# Altium PCB KHKT25_ver2.PcbDoc
Units mm, origin at the board's own origin, x right, y up, seen from the top; angles counter-clockwise.
Board outline 49.89 x 30.03 mm, 2 copper layers (Top Layer, Bottom Layer); 53 components, 27 nets, 171 pads, 26 vias.
Unrouted connection lines stored in the file: 4.
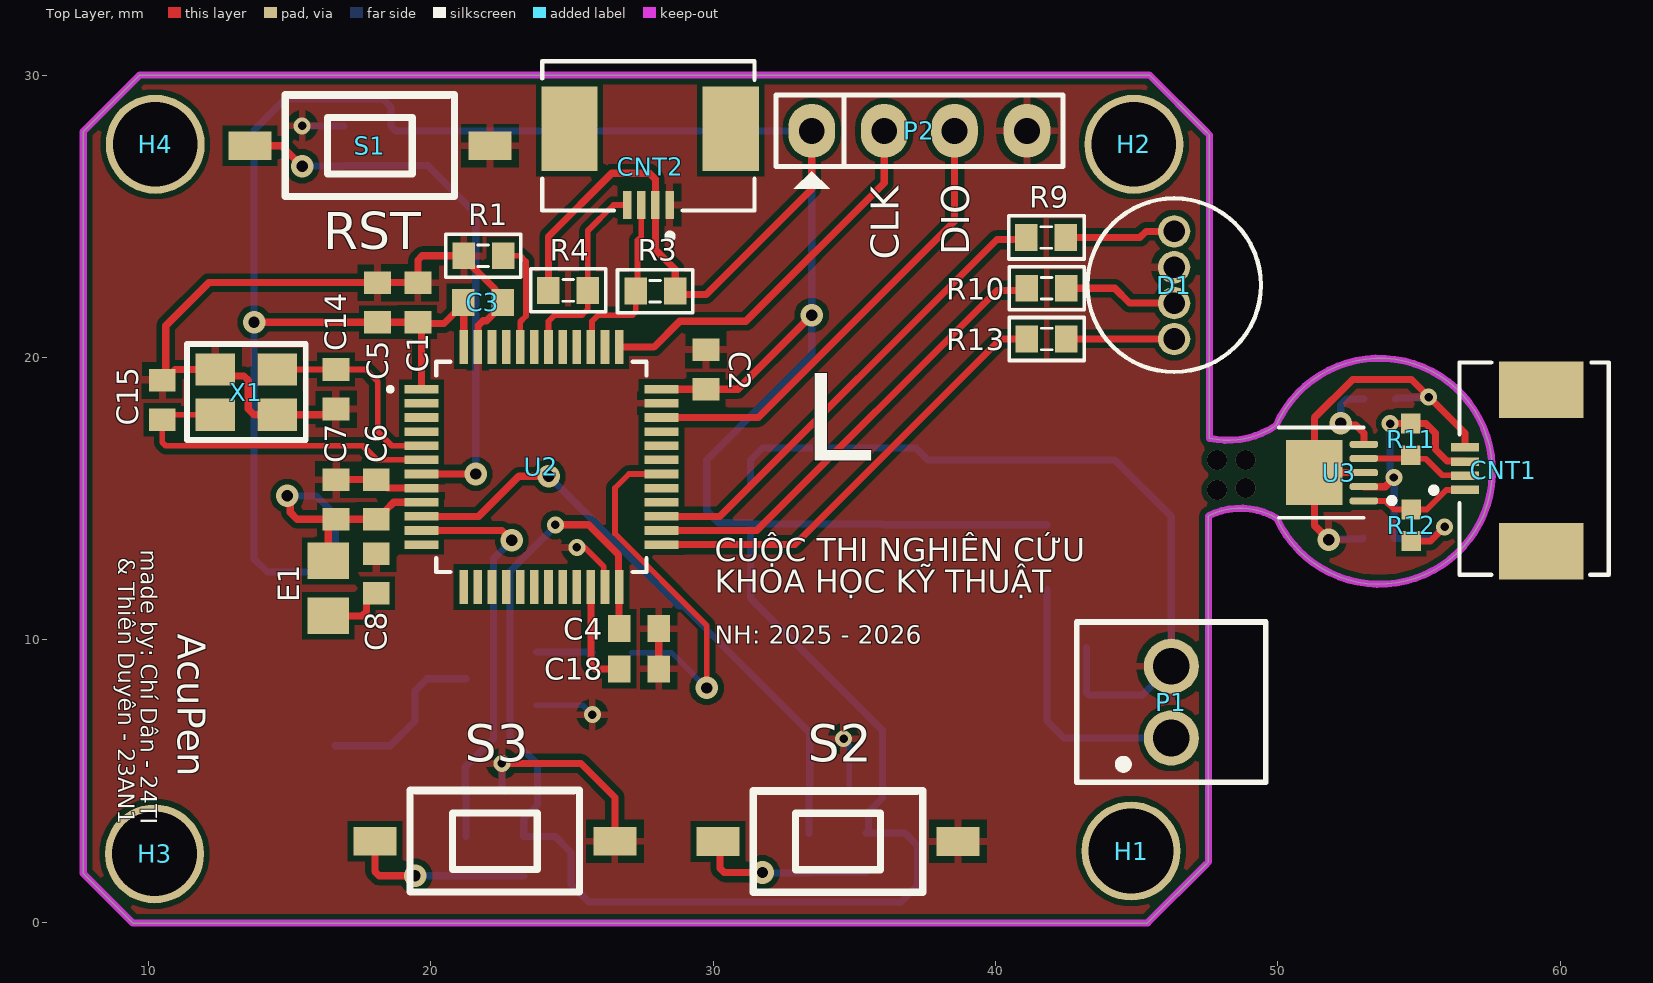
[diagram p0: Top Layer view]
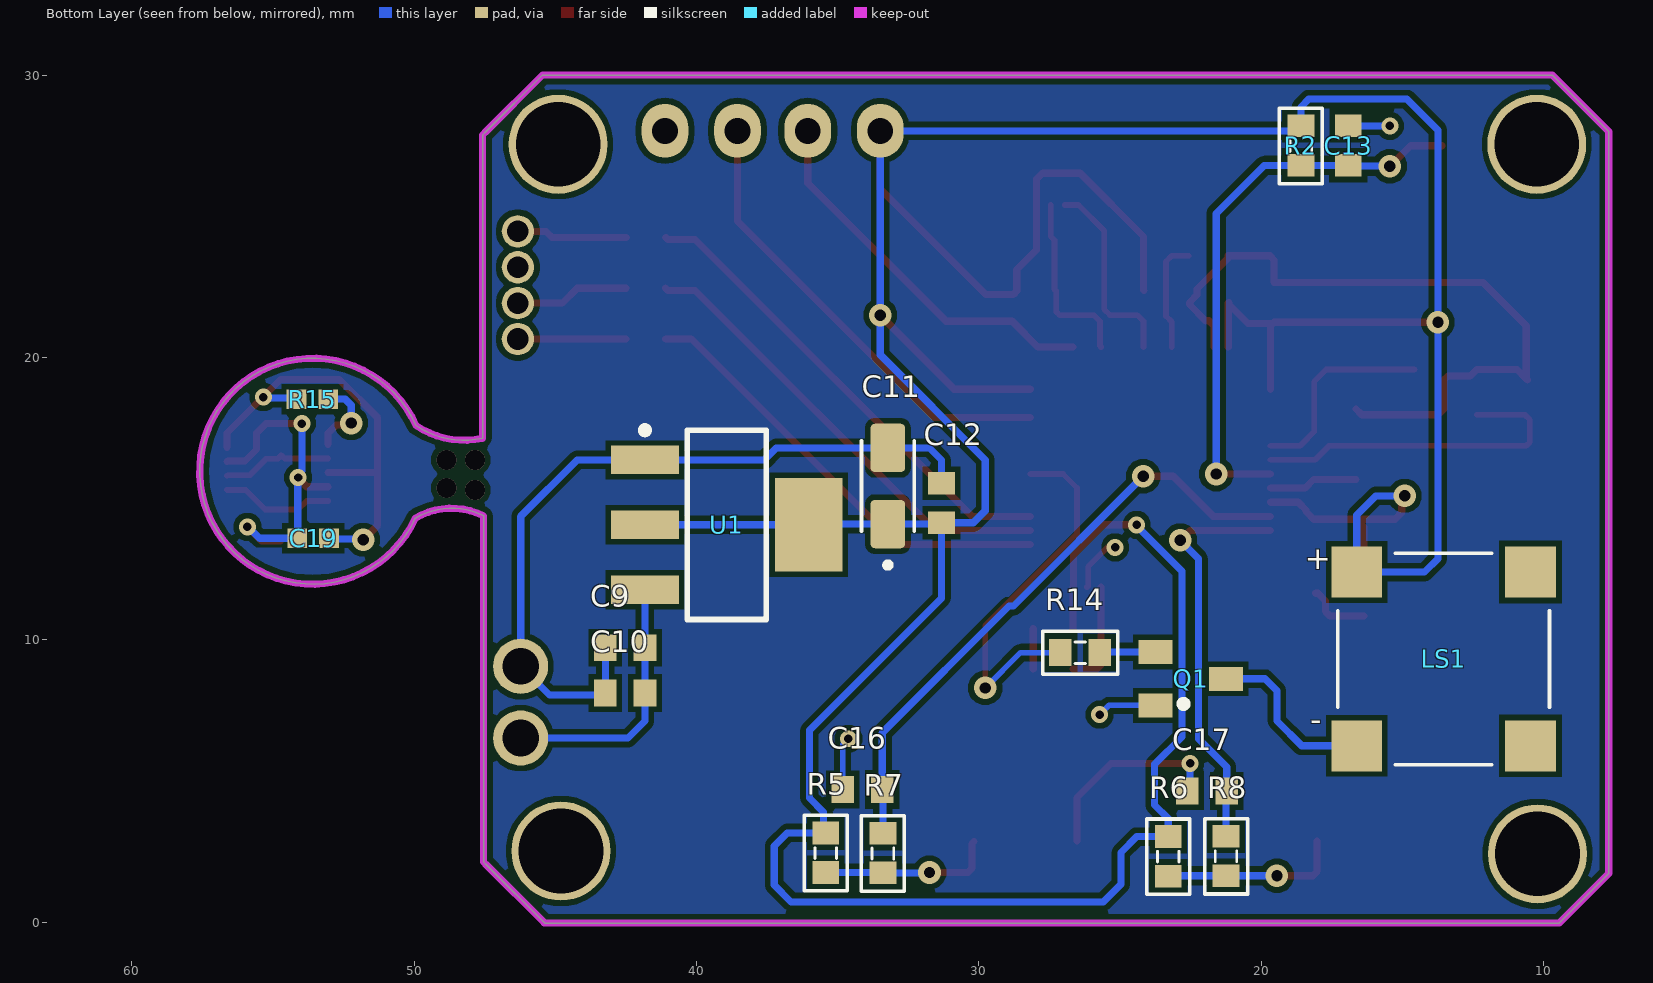
[diagram p1: Bottom Layer view, seen from below]
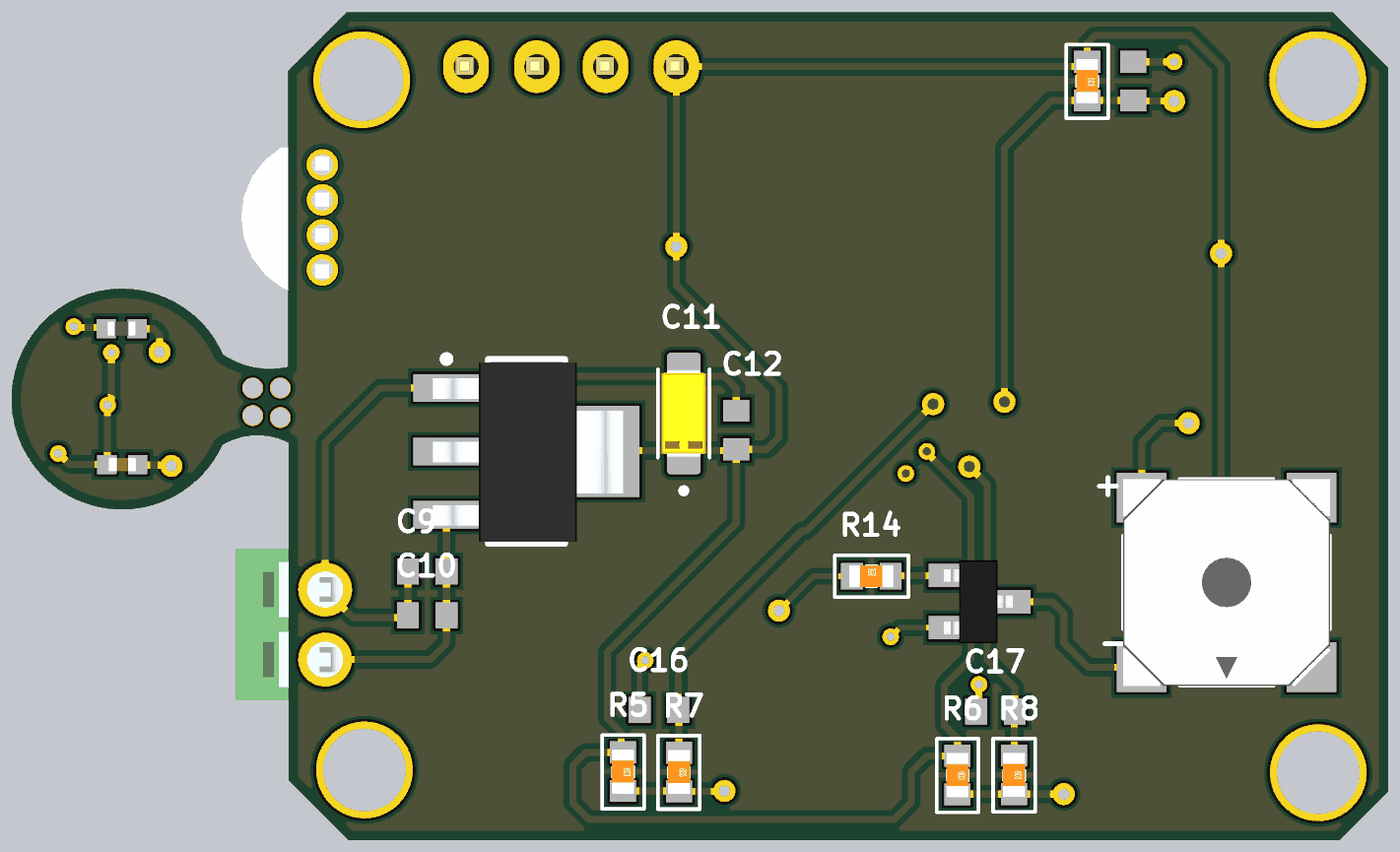
[diagram p2: 3D render of the assembled board from below, using the file's embedded part models]

## Layer stack, top to bottom
Top Solder: solder mask 0.0102, Solder Resist, Dk 3.5
Top Layer: signal copper 0.0356
Dielectric 1: dielectric 0.32, FR-4, Dk 4.8
Bottom Layer: signal copper 0.0356
Bottom Solder: solder mask 0.0102, Solder Resist, Dk 3.5

## Board outline
9.45,-0.025 45.375,-0.025 47.425,2.025 47.541,2.141 47.541,14.391 cw(c48.673,12.169) 49.953,14.309 ccw(c53.591,15.973) 49.932,17.59 cw(c48.226,20.133) 47.573,17.141 47.573,27.877 47.425,28.025 45.45,30 9.7,30 7.7,28 7.7,1.725 8.125,1.3

## Design rules (kind name [scope] priority, off if disabled: settings)
Clearance [All] p1: gap=0.203 ignorepadtopadclearanceinfootprint=TRUE
PolygonConnect [All] p1: connectstyle=Relief reliefconductorwidth=0.254 reliefentries=4 polygonreliefangle="90 Angle" airgapwidth=0.254
RoutingVias [All] p1: holewidth=0.4 width=0.8 viastyle="Through Hole" minholewidth=0.3 minwidth=0.6 maxholewidth=0.4 maxwidth=0.8
SolderMaskExpansion [All] p1: expansion=0.102
Width [All] p1: maxlimit=0.254 minlimit=0.127 preferedwidth=0.203
30 further rules are at their usual default settings.

## Components (designator, comment, footprint, x,y, rotation, side; value= is the part's Value field where it differs from the comment)
C1 "Cap Non-Pol SMD" CAP-SM-0603 18.125,21.95 r270 top value=10uF
C2 "Cap Non-Pol SMD" CAP-SM-0603 29.75,19.575 r270 top value=100nF
C3 "Cap Non-Pol SMD" CAP-SM-0603 21.85,21.95 r180 top value=100nF
C4 "Cap Non-Pol SMD" CAP-SM-0603 27.375,10.4 r180 top value=100nF
C5 "Cap Non-Pol SMD" CAP-SM-0603 19.55,21.95 r270 top value=100nF
C6 "Cap Non-Pol SMD" CAP-SM-0603 18.075,14.975 r270 top value=10nF
C7 "Cap Non-Pol SMD" CAP-SM-0603 16.65,14.975 r270 top value=1uF
C8 "Cap Non-Pol SMD" CAP-SM-0603 18.075,12.35 r270 top value=1uF
C9 "Cap Non-Pol SMD" CAP-SM-0603 42.525,9.725 r180 bottom value=100nF
C10 "Cap Non-Pol SMD" CAP-SM-0603 42.525,8.125 r180 bottom value=1uF
C11 "1uF" CAP_TAN_3216 33.225,15.45 r90 bottom
C12 "Cap Non-Pol SMD" CAP-SM-0603 31.325,14.85 r270 bottom value=100uF
C13 "Cap Non-Pol SMD" CAP-SM-0603 16.925,27.5 r90 bottom value=100nF
C14 "Cap Non-Pol SMD" CAP-SM-0603 16.65,18.875 r90 top value=15pF
C15 "Cap Non-Pol SMD" CAP-SM-0603 10.5,18.5 r270 top value=15pF
C16 "Cap Non-Pol SMD" CAP-SM-0603 34.125,4.7 r180 bottom value=2.2uF
C17 "Cap Non-Pol SMD" CAP-SM-0603 21.925,4.65 r180 bottom value=2.2uF
C18 "Cap Non-Pol SMD" CAP-SM-0603 27.375,8.975 r180 top value=4.7uF
C19 "Cap Non-Pol SMD" CAP_0402 53.575,13.6 r0 bottom value=10nF
CNT1 "HF4X1" FPC_FFC_4P 57.975,16 r90 top
CNT2 "HF4X1" FPC_FFC_4P 27.775,26.75 r180 top
D1 "RGB_LED" RGB_LED 46.325,22.56 r270 top
E1 "120R" FB_MI0805K400R-10 16.375,11.825 r270 top
H1 "Hole" "LO KHOAN 3MM" 44.8,2.525 r0 top
H2 "Hole" "LO KHOAN 3MM" 44.9,27.55 r0 top
H3 "Hole" "LO KHOAN 3MM" 10.225,2.425 r0 top
H4 "Hole" "LO KHOAN 3MM" 10.25,27.55 r0 top
LS1 "BZ-7525" XDCCMT-7525 13.55,9.325 r180 bottom
P1 "Header 2" DOMINO_2P 46.225,7.797 r90 top
P2 "Header 4H" JP4 36.035,28.025 r0 top
Q1 "C1815" SOT23B 22.5,8.625 r270 bottom
R1 "RESISTOR SMD" RES-SM-0603 22.561,23.6 r180 top value=10K
R2 "RESISTOR SMD" RES-SM-0603 18.6,28.186 r270 bottom value=10K
R3 "RESISTOR SMD" RES-SM-0603 28.65,22.35 r180 top value=1K
R4 "RESISTOR SMD" RES-SM-0603 24.175,22.375 r0 top value=1K
R5 "RESISTOR SMD" RES-SM-0603 35.425,3.15 r270 bottom value=10K
R6 "RESISTOR SMD" RES-SM-0603 23.3,3.025 r270 bottom value=10K
R7 "RESISTOR SMD" RES-SM-0603 33.4,3.136 r270 bottom value=10K
R8 "RESISTOR SMD" RES-SM-0603 21.25,3.036 r270 bottom value=10K
R9 "RESISTOR SMD" RES-SM-0603 41.104,24.25 r0 top value=30
R10 "RESISTOR SMD" RES-SM-0603 41.115,22.45 r0 top value=30
R11 "RESISTOR SMD" RES_0402 54.7,17.1 r270 top value=1K
R12 "RESISTOR SMD" RES_0402 54.725,14.06 r90 top value=1K
R13 "RESISTOR SMD" RES-SM-0603 41.115,20.655 r0 top value=30
R14 "RESISTOR SMD" RES-SM-0603 27.111,9.55 r180 bottom value=1K5
R15 "RESISTOR SMD" RES_0402 53.6,18.525 r0 bottom value=1K
S1 "RST" SW_SMD 17.85,27.5 r180 top
S2 "Tact SW - 2Pin" SW_SMD 34.425,2.864 r180 top
S3 "Tact SW - 2Pin" SW_SMD 22.275,2.875 r180 top
U1 "AMS1117-3.3" SOT223-4N 38.925,14.075 r180 bottom
U2 "STM32U575CIT6" LQFP48-7x7mm_STM 23.925,16.125 r0 top
U3 "MLX90632SLD-DCB-000-SP" MLX90632 52.1,15.925 r90 top
X1 "48MHz" TSX-3225 14.575,17.975 r180 top

## Footprints (in the part's own frame and the unit in brackets; to place one, negate y for a bottom-side part, rotate by r counter-clockwise, add the part's x,y. Pads: shape width x height; smd on the part's side, far side on the other; paste and mask are expansions set on the pad)
CAP-SM-0603 [mm] "SMD Ceramic Capacitor Size 0603"
  rect 0.8x0.95 smd: 1(-0.7,0) 2(0.7,0)
  body extent -0.85,-0.45 0.85,0.45, height 0.6
CAP_0402 [mm] "SMD Ceramic Capacitor Size 0603"
  rect 0.7x0.7 smd: 1(-0.559,0) 2(0.559,0)
  body extent -0.5,-0.25 0.5,0.25, height 0.55
CAP_TAN_3216 [mm]
  rrect25% 1.71x1.23 smd: 1(-1.35,0) 2(1.35,0)
  silkscreen extent -2.9,-0.93 1.6,0.93, body extent -1.6,-0.8 1.6,0.8, height 1.8
DOMINO_2P [mm] "2.54mm"
  round 1.95 hole 1.3: 1(-1.27,0) 2(1.27,0)
  silkscreen extent -2.84,-3.35 2.84,3.35, body extent -2.74,-3.25 2.74,3.25, height 8.59
FB_MI0805K400R-10 [mm]
  rect 1.285x1.47 smd: 1(-0.973,0) 2(0.973,0)
  body extent -1,-0.63 1,0.63, height 1.1
FPC_FFC_4P [mm]
  rect 0.3x1 smd: 1(-0.687,1.352) 2(-0.186,1.352) 3(0.313,1.352) 4(0.814,1.352)
  rect 2x3 smd: P1(-2.857,-1.352) P2(2.857,-1.352)
  silkscreen extent -3.7,-3.74 3.82,2.56
JP4 [mil] "Jumper 4"
  oval 65x75 hole 36: 1(-100,0) 2(1,0) 3(99,0) 4(200,0)
  silkscreen extent -150,-81 250,50, body extent -148,-48 248,50, height 323
"LO KHOAN 3MM" [mil]
  round 138 hole 118.1: 1(0,0)
LQFP48-7x7mm_STM [mm]
  rect 1.194x0.305 smd paste+0 mask+0: 1(-4.25,2.75) 2(-4.25,2.25) 3(-4.25,1.75) 4(-4.25,1.25) 5(-4.25,0.75) 6(-4.25,0.25) 7(-4.25,-0.25) 8(-4.25,-0.75) 9(-4.25,-1.25) 10(-4.25,-1.75) 11(-4.25,-2.25) 12(-4.25,-2.75) 25(4.25,-2.75) 26(4.25,-2.25) 27(4.25,-1.75) 28(4.25,-1.25) 29(4.25,-0.75) 30(4.25,-0.25) 31(4.25,0.25) 32(4.25,0.75) 33(4.25,1.25) 34(4.25,1.75) 35(4.25,2.25) 36(4.25,2.75)
  rect 0.305x1.194 smd paste+0 mask+0: 13(-2.75,-4.25) 14(-2.25,-4.25) 15(-1.75,-4.25) 16(-1.25,-4.25) 17(-0.75,-4.25) 18(-0.25,-4.25) 19(0.25,-4.25) 20(0.75,-4.25) 21(1.25,-4.25) 22(1.75,-4.25) 23(2.25,-4.25) 24(2.75,-4.25) 37(2.75,4.25) 38(2.25,4.25) 39(1.75,4.25) 40(1.25,4.25) 41(0.75,4.25) 42(0.25,4.25) 43(-0.25,4.25) 44(-0.75,4.25) 45(-1.25,4.25) 46(-1.75,4.25) 47(-2.25,4.25) 48(-2.75,4.25)
  silkscreen extent -5.43,-3.72 3.72,3.72, body extent -4.5,-4.5 4.5,4.5, height 1.6
MLX90632 [mil] "IC_MLX90632SLD-DCB-000-SP"
  rrect80% 9.84x40 smd: 1(-39.5,-37.12) 2(-19.69,-37.12) 3(0,-37.12) 4(19.69,-37.12) 5(39.37,-37.12)
  rect 90.55x78.74 smd paste+0: 6(0,31.89)
  silkscreen extent -63,-80 63,81, body extent -59,-37 59,81, height 39
RES-SM-0603 [mm]
  rect 0.8x0.95 smd: 1(-0.014,0) 2(1.386,0)
  silkscreen extent -0.64,-0.76 2.03,0.76, body extent -0.11,-0.4 1.49,0.4, height 0.3
RES_0402 [mm]
  rect 0.7x0.7 smd: 1(-0.559,0) 2(0.559,0)
  body extent -0.5,-0.25 0.5,0.25, height 0.4
RGB_LED [mil] "5mm"
  round 45 hole 30 paste-99999 mask+2: 1(-75,0) 2(-25,0) 3(25,0) 4(75,0)
  silkscreen extent -121,-121 121,121, body extent -100,-116 116,116, height 402
SOT23B [mm] "SOT 23B"
  rect 0.85x1.2 smd: 1(0.94,-1.245) 2(0,1.25) 3(-0.95,-1.25)
  silkscreen extent 0.77,-0.38 1.02,-0.13, body extent -1.5,-1.3 1.5,1.2, height 1.06
SOT223-4N [mm] "SOT223, 4-Leads, Body 6.5x3.5mm, Pitch 2.3mm, Lead Span 7mm, IPC Medium Density"
  rect 2.4x1 smd: 1(-2.9,2.3) 2(-2.9,0) 3(-2.9,-2.3)
  rect 2.4x3.3 smd: 4(2.9,0)
  silkscreen extent -3.03,-3.35 1.4,3.47, body extent -3.39,-3.27 3.5,3.23, height 1.72
SW_SMD [mil] "3*6*5mm"
  rect 60x40 smd paste+0 mask+4: 1(167.32,0) 2(-167.32,0)
  silkscreen extent -134,-83 118,71
TSX-3225 [mm]
  rect 1.4x1.15 smd: 1(0,-1.6) 2(2.2,-1.6) 3(2.2,0) 4(0,0)
  silkscreen extent -1,-2.5 3.2,0.9
XDCCMT-7525 [mm]
  rect 1.8x1.8 smd: 1(3.075,3.075) 2(3.075,-3.075) N(-3.075,-3.075) P(-3.075,3.075)
  silkscreen extent -3.75,-3.75 3.75,3.75, body extent -3.75,-3.75 3.75,3.75, height 2.5

## Part data
C1 C2 C3 C4 C5 C6 C7 C8 C9 C10 C12 C13 C14 C15 C16 C17 C18 C19: "Capacitor"
C11: library part Cap_Tantalum, "3216", Package="SMD-2 KEMET", Check_prices=https://www.snapeda.com/parts/T491A475K025AT/KEMET/view-part/?ref=eda, MF=KEMET, MP=T491A475K025AT, SnapEDA_Link=https://www.snapeda.com/parts/T491A475K025AT/KEMET/view-part/?ref=snap
D1: "Description", Manufacturer_Name=Kingbright, Manufacturer_Part_Number=L-154A4SURKQBDZGW, Copyright="Copyright (C) 2025 Ultra Librarian. All rights reserved.", RefDes=RefDes, Type="LED Lighting"
E1: library part MI0805K400R-10, "EMI Ferrite Chip Bead, 0805, 1500MA, 40 Ohms @100MHz, DCR Max 0.050Ohm", Package="0805 Laird", Check_prices=https://www.snapeda.com/parts/MI0805K400R-10/Laird-Signal+Integrity+Products/view-part/?ref=eda, MF="Laird-Signal Integrity Products", MP=MI0805K400R-10, SnapEDA_Link=https://www.snapeda.com/parts/MI0805K400R-10/Laird-Signal+Integrity+Products/view-part/?ref=snap
H1 H2 H3 H4: "Hole 3mm"
LS1: "7.5 mm, 3.6 Vo-p, 80 dB, Surface Mount (SMT), Magnetic Audio Transducer Buzzer", Package="CUI Devices", Check_prices=https://www.snapeda.com/parts/CMT-7525-80-SMT-TR/Same+Sky/view-part/?ref=eda, MF="Same Sky", MP=CMT-7525-80-SMT-TR, SnapEDA_Link=https://www.snapeda.com/parts/CMT-7525-80-SMT-TR/Same+Sky/view-part/?ref=snap
P1: "Header, 2-Pin", LatestRevisionDate=17-Jul-2002, LatestRevisionNote="Re-released for DXP Platform.", Publisher="Altium Limited"
P2: "Header, 4-Pin, Right Angle", LatestRevisionDate=17-Jul-2002, LatestRevisionNote="Re-released for DXP Platform.", Publisher="Altium Limited"
Q1: "NPN Bipolar Transistor"
R1 R2 R3 R4 R5 R6 R7 R8 R9 R10 R11 R12 R13 R14 R15: "Resistor"
S1: library part "Tact SW - 2Pin", "Switch button 2 pin"
S2 S3: "Switch button 2 pin"
U1: "Sot223/Pkg 1-Amp 3.3-Volt Low Drop Out Voltage Regulatator", Package="SOT-223 Seeed Technology", Check_prices=https://www.snapeda.com/parts/AMS1117-3.3/Advanced+Monolithic+Systems/view-part/?ref=eda, MF="Advanced Monolithic Systems", MP=AMS1117-3.3, SnapEDA_Link=https://www.snapeda.com/parts/AMS1117-3.3/Advanced+Monolithic+Systems/view-part/?ref=snap
U2: "Ultra-low-power with FPU Arm Cortex-M33 MCU with TrustZone, 160 MHz with 2 Mbytes of Flash memory", Manufacturer_Name=STMicroelectronics, Copyright="Copyright (C) 2025 Ultra Librarian. All rights reserved.", Manufacturer_Part_Number=STM32U575CIT6, RefDes=RefDes, Type=Type
U3: library part MLX90632SLD-BCB-000-SP, Package=None, Availability=Unavailable, MP=MLX90632SLD-BCB-000-SP, Price=None
X1: library part TSX-3225, "Crystal", Package="SMD-4 Epson", Availability=Unavailable, MF=EPSON, MP=TSX-3225, Price=None, SnapEDA_Link=https://www.snapeda.com/parts/TSX-3225/EPSON/view-part/557780/?ref=snap

## Via types
v1: diameter 0.8, hole 0.4, Top Layer to Bottom Layer, 12 vias
v2: diameter 0.6, hole 0.3, Top Layer to Bottom Layer, 10 vias
v3: diameter 0.711, hole 0.711, Top Layer to Bottom Layer, 4 vias

## Nets (pads, with @x,y where several pads share a name; then routed paths per layer and width w, separated by ;. In a path a pad name is that pad's centre, name@x,y a point inside that pad or via, vN(x,y) a via of type N, cw(c..) or ccw(c..) an arc to the next point about the centre after c; other vN are vias at no path point)
+3V3: C1.2 C2.2 C3.2 C4.2 C5.2 C6.2 C7.2 C11.1 C12.2 C19.2 CNT1.3 CNT2.2 E1.1 LS1.P P2.1 R2.1 R3.1 R4.1 R5.1 R6.1 R11.1 R12.1 U1.2 U1.4 U2.1 U2.9 U2.24 U2.36 U2.48 U3.2 | length 177.5
  Top Layer w0.254: v1(13.749,21.25) C5.2 C5.2@19.6,21.2 ; v1(14.925,15.1) 15.029,14.996 15.029,14.519 15.274,14.275 C7.2@16.648,14.275 ; E1.1 16.375,14.002 C7.2@16.648,14.275 ; U2.9 18.697,14.875 18.423,14.601 18.423,14.548 18.15,14.275 C6.2 C7.2 C7.2@16.648,14.275 ; U2.1 19.675,21.125 C5.2@19.6,21.2 ; U2.48 21.175,21.925 C3.2 21.15,21.875 20.475,21.2 C5.2@19.6,21.2 ; R4.1 24.175,22.389 24.175,24.284 26.416,26.525 27.75,26.525 27.961,26.314 CNT2.2 27.961,23.814 28.664,23.111 R3.1 28.789,22.225 29.75,22.225 33.495,25.97 P2.1 ; v2(24.414,14.075) 25.587,14.075 26.658,13.004 26.658,11.892 U2.24 C4.2 ; U2.36 C2.2 30.875,18.875 33.495,21.495 v1(33.495,21.5) ; U3.2 53.798,15.425 54.106,15.733 v2(54.106,15.751) ; v2(53.974,17.659) R11.1 55.236,17.659 55.575,17.32 55.575,16.745 55.986,16.333 56.603,16.333 CNT1.3 ; R12.1 55.401,13.501 v2(55.9,14)
  Bottom Layer w0.254: v1(14.925,15.1) 15.95,15.1 16.625,14.425 LS1.P 14.225,12.4 13.749,12.876 13.749,28.049 14.85,29.15 18.323,29.15 18.6,28.873 R2.1 18.775,28.025 P2.1 v1(33.495,21.5) 33.495,20.095 29.775,16.375 29.775,14.575 30.2,14.15 C12.2 ; v2(24.414,14.075) 24.414,14.032 22.814,12.432 22.814,6.561 23.779,5.596 23.779,4.154 23.3,3.675 R6.1 24.411,3.039 24.975,2.475 24.975,1.35 25.6,0.725 36.65,0.725 37.25,1.325 37.25,2.7 36.786,3.164 R5.1@35.5,3.164 ; R5.1 R5.1@35.5,3.164 ; U1.2 U1.4 36,14.1 C11.1 31.375,14.1 C12.2 ; v2(53.974,17.659) 53.974,15.977 54.106,15.845 v2(54.106,15.751) 54.12,15.737 54.12,13.614 C19.2 55.475,13.6 55.85,13.975 55.875,13.975 v2(55.9,14) ; C12.2 31.325,11.475 36,6.8 36,4.4 35.5,3.9 R5.1@35.5,3.164
BUZZER: R14.1 U2.30 | length 13.4
  Top Layer w0.203: U2.30 27.025,15.875 26.525,15.375 26.525,13.764 29.775,10.514 v1(29.775,8.3)
  Bottom Layer w0.203: R14.1 28.525,9.55 v1(29.775,8.3)
GND: C1.1 C2.1 C3.1 C4.1 C5.1 C6.1 C7.1 C8.1 C9.1 C10.1 C11.2 C12.1 C13.2 C14.1 C15.1 C16.1 C17.1 C18.1 C19.1 CNT1.4 CNT2.1 D1.2 P1.2 P2.4 Q1.1 R1.2 R15.2 S1.2 S2.2 S3.2 U1.1 U2.8 U2.23 U2.35 U2.47 U3.3 U3.6 X1.2 X1.4 | length 88
  Top Layer w0.203: v2(25.175,13.275) 25.455,13.275 26.132,12.598 26.132,11.918 U2.23
  Top Layer w0.254: C15.1@10.575,19.2 C15.1@10.619,19.244 ; C7.1 C6.1 18.15,15.675 18.45,15.375 U2.8 ; C14.1 16.45,17.975 X1.4 13.749,17.975 13.545,18.179 13.545,19.2 13.396,19.349 12.601,19.349 X1.2 10.95,19.575 C15.1@10.619,19.244 ; U2.47 21.675,21.125 21.852,21.302 21.977,21.302 22.55,21.875 C3.1 22.277,22.223 22.277,22.423 21.175,23.525 R1.2 19.699,23.6 19.55,23.451 C5.1 C1.1 12.144,22.65 10.619,21.125 C15.1@10.619,19.244 ; v2(22.525,5.625) 25.325,5.625 26.525,4.425 S3.2 ; C18.1 C4.1 ; v1(51.8,13.55) 51.29,14.06 U3.6 ; U3.3 U3.6 ; CNT1.4 56.623,17.327 54.725,19.225 52.65,19.225 51.29,17.865 U3.6
  Bottom Layer w0.203: Q1.1 25.393,7.685 v2(25.725,7.353) ; v2(34.622,6.5) 34.825,6.297 C16.1
  Bottom Layer w0.254: v2(15.45,28.2) C13.2 ; v2(22.525,5.625) 22.525,4.75 C17.1 ; C12.1 31.325,16.375 31.75,16.8 C11.2 37.175,16.8 37.6,16.375 U1.1 44.225,16.375 46.225,14.375 P1.2 45.208,8.05 43.3,8.05 C10.1 C9.1 ; v1(51.8,13.55) 51.825,13.575 52.991,13.575 C19.1 ; R15.2 54.196,18.563 55.298,18.563 v2(55.336,18.6)
LED_B: R13.1 U2.25 | length 15.9
  Top Layer w0.254: U2.25 32.9,13.375 40.18,20.655 R13.1
LED_G: R10.1 U2.26 | length 16.5
  Top Layer w0.254: U2.26 31.55,13.875 40.05,22.375 41.026,22.375 R10.1
LED_R: R9.1 U2.27 | length 17
  Top Layer w0.254: U2.27 30.25,14.375 40.05,24.175 41.015,24.175 R9.1
NetC8_2: C8.2 E1.2 | length 2.3
  Top Layer w0.254: E1.2 17.578,10.852 17.727,11.001 17.727,11.377 18,11.65 C8.2
NetC14_2: C14.2 U2.5 X1.1 | length 7.3
  Top Layer w0.203: X1.1 C14.2 17.7,19.575 18.125,19.15 18.125,17.375 18.625,16.875 U2.5
NetC15_2: C15.2 U2.6 X1.3 | length 12.2
  Top Layer w0.203: X1.3 10.675,17.975 C15.2 10.5,16.994 10.619,16.875 17.594,16.875 18.089,16.38 19.67,16.38 U2.6
NetC18_2: C18.2 U2.22 | length 3.8
  Top Layer w0.254: U2.22 25.675,9.124 25.824,8.975 C18.2
NetD1_1: D1.1 R9.2 | length 3.9
  Top Layer w0.254: R9.2 45.11,24.25 45.325,24.465 D1.1
NetD1_3: D1.3 R10.2 | length 4
  Top Layer w0.254: R10.2 44.225,22.45 44.75,21.925 D1.3
NetD1_4: D1.4 R13.2 | length 3.8
  Top Layer w0.254: R13.2 D1.4
NetLS1_N: LS1.N Q1.2 | length 6.2
  Bottom Layer w0.254: LS1.N 18.573,6.25 19.45,7.127 19.45,8.2 19.875,8.625 Q1.2
NetQ1_3: Q1.3 R14.2 | length 2
  Bottom Layer w0.254: Q1.3 25.7,9.575 R14.2
NetR1_1: R1.1 U2.44 | length 4
  Top Layer w0.203: R1.1 23.175,23.6 23.375,23.4 23.375,21.469 23.175,21.269 U2.44
NetR5_2: R5.2 R7.2 S2.1 | length 6.2
  Top Layer w0.254: S2.1 30.25,2.789 30.25,1.913 30.399,1.764 v1(31.75,1.764)
  Bottom Layer w0.254: v1(31.75,1.764) 31.764,1.75 R7.2 33.414,1.764 R5.2
NetR6_2: R6.2 R8.2 S3.1 | length 6.4
  Top Layer w0.254: S3.1 18.025,1.799 18.174,1.65 v1(19.45,1.65)
  Bottom Layer w0.254: v1(19.45,1.65) R8.2 23.289,1.65 R6.2
NetR15_1: R15.1 U3.5 | length 2.9
  Top Layer w0.254: v1(52.225,17.678) 52.29,17.613 52.757,17.613 53.043,17.327 U3.5
  Bottom Layer w0.254: v1(52.225,17.678) 52.225,18.31 52.44,18.525 R15.1
NRST: C13.1 R2.2 S1.1 U2.7 | length 20.2
  Top Layer w0.254: S1.1 14.725,27.5 v1(15.45,26.775) ; U2.7 v1(21.6,15.875)
  Bottom Layer w0.254: v1(15.45,26.775) 16.9,26.775 C13.1 R2.2 19.9,26.8 21.6,25.1 v1(21.6,15.875)
SCL: CNT1.2 CNT2.4 R4.2 R11.2 U2.42 U3.4 | length 11
  Top Layer w0.203: U2.42 24.175,21.281 24.394,21.5 25.362,21.5 25.561,21.699 R4.2 25.561,24.486 26.473,25.398 CNT2.4 ; U3.4 54.584,16.425 R11.2 54.827,16.414 55.236,16.414 55.818,15.832 56.605,15.832 CNT1.2
SDA: CNT1.1 CNT2.3 R3.2 R12.2 U2.39 U3.1 | length 10.5
  Top Layer w0.203: U2.39 25.718,20.418 25.718,21.281 25.937,21.5 27.145,21.5 27.264,21.619 R3.2 27.325,22.411 27.325,24.15 27.461,24.286 CNT2.3 ; U3.1 53.803,14.922 54.106,14.619 R12.2 55.272,14.619 55.958,15.304 56.614,15.304 CNT1.1
SWCLK: P2.2 U2.37 | length 13.6
  Top Layer w0.254: U2.37 27.914,20.375 28.82,21.281 31.159,21.281 36.061,26.182 P2.2
SWDIO: P2.3 U2.34 | length 16.5
  Top Layer w0.254: U2.34 31.6,17.875 38.55,24.825 P2.3
VCC: C9.2 C10.2 P1.1 U1.3 | length 9.3
  Bottom Layer w0.254: U1.3 C9.2 C10.2 41.825,7.127 42.426,6.527 P1.1
WKUP1: C16.2 R7.1 U2.10 | length 21.7
  Top Layer w0.254: U2.10 21.707,14.375 23.124,15.792 v1(24.186,15.792)
  Bottom Layer w0.254: v1(24.186,15.792) 28.78,11.198 28.936,11.198 33.425,6.709 C16.2 33.4,4.675 R7.1
WKUP3: C17.2 R8.1 U2.11 | length 14.5
  Top Layer w0.254: U2.11 22.525,13.875 v1(22.875,13.525)
  Bottom Layer w0.254: R8.1 21.25,4.625 C17.2 21.225,5.5 22.225,6.5 22.225,12.875 v1(22.875,13.525)
pads on no net: CNT1.P1 CNT1.P2 CNT2.P1 CNT2.P2 H1.1 H2.1 H3.1 H4.1 LS1.1 LS1.2 U2.2 U2.3 U2.4 U2.12 U2.13 U2.14 U2.15 U2.16 U2.17 U2.18 U2.19 U2.20 U2.21 U2.28 U2.29 U2.31 U2.32 U2.33 U2.38 U2.40 U2.41 U2.43 U2.45 U2.46
copper on no net:
  other v3: 47.85,15.304 48.85,15.375 47.85,16.375 48.85,16.375

## Polygon pours and split planes (outlines as drawn)
GND on Top Layer "GND_L01_P000" (solid, pour order 0): 7.675,27.925 9.7,29.95 9.7,29.975 45.425,29.975 47.575,27.825 47.575,17.15 48.925,17.15 49.05,17.275 49.5,17.275 49.903,17.678 50,17.678 50,17.96 51.39,19.35 51.55,19.35 51.875,19.675 52.325,19.675 52.525,19.875 53.3,19.875 53.375,19.95 54.125,19.95 54.3,19.775 55.1,19.775 55.425,19.45 55.75,19.45 56.225,18.975 56.225,18.95 56.25,18.95 56.95,18.25 56.95,18.075 57.275,17.75 57.275,17.4 57.475,17.2 57.475,16.6 57.6,16.475 57.6,15.737 57.55,15.687 57.55,15.1 57.375,14.925 57.4,14.9 57.4,14.525 57.125,14.25 57.125,13.95 56.825,13.65 56.825,13.575 55.9,12.65 55.55,12.65 54.85,11.95 52.75,11.95 52.675,12.025 52,12.025 51.55,12.475 51.275,12.475 49.975,13.775 49.975,14.025 49.55,14.45 49.225,14.45 49.1,14.575 47.85,14.575 47.65,14.375 47.65,14.325 47.575,14.325 47.55,14.35 47.55,2.15 45.375,-0.025 9.425,-0.025 7.7,1.7 7.7,28
no net on Bottom Layer "NONET_L02_P001" (solid, pour order 1): 7.69,27.925 9.715,29.95 9.715,29.975 45.44,29.975 47.59,27.825 47.59,17.15 48.94,17.15 49.065,17.275 49.515,17.275 49.918,17.678 50.015,17.678 50.015,17.96 51.404,19.35 51.565,19.35 51.89,19.675 52.34,19.675 52.54,19.875 53.315,19.875 53.39,19.95 54.14,19.95 54.315,19.775 55.115,19.775 55.44,19.45 55.765,19.45 56.24,18.975 56.24,18.95 56.265,18.95 56.965,18.25 56.965,18.075 57.29,17.75 57.29,17.4 57.49,17.2 57.49,16.6 57.615,16.475 57.615,15.737 57.565,15.687 57.565,15.1 57.39,14.925 57.415,14.9 57.415,14.525 57.14,14.25 57.14,13.95 56.84,13.65 56.84,13.575 55.915,12.65 55.565,12.65 54.865,11.95 52.765,11.95 52.69,12.025 52.015,12.025 51.565,12.475 51.29,12.475 49.99,13.775 49.99,14.025 49.565,14.45 49.24,14.45 49.115,14.575 47.865,14.575 47.665,14.375 47.665,14.325 47.59,14.325 47.565,14.35 47.565,2.15 45.39,-0.025 9.44,-0.025 7.715,1.7 7.715,28

## Keep-outs
Keep-Out Layer:
  lines w0.254: 34.537,-0.025 12.862,-0.025 9.45,-0.025 8.125,1.3 7.7,1.725 7.7,28 9.7,30 45.45,30 47.425,28.025 47.573,27.877 47.573,17.141 ccw(c48.226,20.133) 49.932,17.59 cw(c53.591,15.973) 49.953,14.309 ccw(c48.673,12.169) 47.541,14.391 47.541,2.141 47.425,2.025 45.375,-0.025 ; 34.575,-0.025 45.4,-0.025

## Silkscreen, mask and mechanical layers (free items; w line width, h text height)
Top Overlay:
  text "DIO" at 39.065,23.622 h1 r90
  text "CLK" at 36.576,23.455 h1 r90
  text "L" at 33.172,15.304 h5.5
  text "made by: Chí Dân - 24TI" at 9.55,13.184 h1 r270
  text "& Thiên Duyên - 23AN1" at 8.738,12.913 h1 r270
  text "CUỘC THI NGHIÊN CỨU" at 30.068,12.505 h1.4
  text "KHOA HỌC KỸ THUẬT" at 30.068,11.379 h1.4
  text "AcuPen" at 10.719,10.211 h1.7 r270
  text "NH: 2025 - 2026" at 30.068,9.652 h1.1
Mechanical 13:
  lines w0.254: 4.359,1.375 4.865,-0.15 ; 4.405,28.352 4.916,29.875 ; 4.611,-0.15 5.119,-0.15 ; 4.662,29.875 5.17,29.875 ; 4.877,6.839 4.865,-0.15 ; 4.904,22.886 4.916,29.875 ; 5.375,1.373 4.865,-0.15 ; 5.421,28.35 4.916,29.875 ; 62.688,10.588 63.196,12.112 ; 62.688,21.663 63.196,20.139 ; 62.942,12.112 63.45,12.112 ; 62.942,20.139 63.45,20.139 ; 63.196,9.572 63.196,12.112 ; 63.196,22.679 63.196,20.139 ; 63.704,10.588 63.196,12.112 ; 63.704,21.663 63.196,20.139
  text "8.026 (mm)" at 66.853,9.117 h1.52 r90
  text "30.025 (mm)" at 5.791,7.091 h1.52 r89.9

## Dimensions
47.512,34.036 to 7.638,33.477 on Mechanical 13

## Text inside footprints (layer, text, board x,y; h text height)
LS1: Mechanical 13 "+" at 18.465,12.5 h0.81; Mechanical 13 "-" at 18.265,6.785 h0.81; Bottom Overlay "-" at 18.265,6.785 h0.81; Bottom Overlay "+" at 18.465,12.5 h0.81